# EAGLE board W1209_PIC (EAGLE 7.7.0)
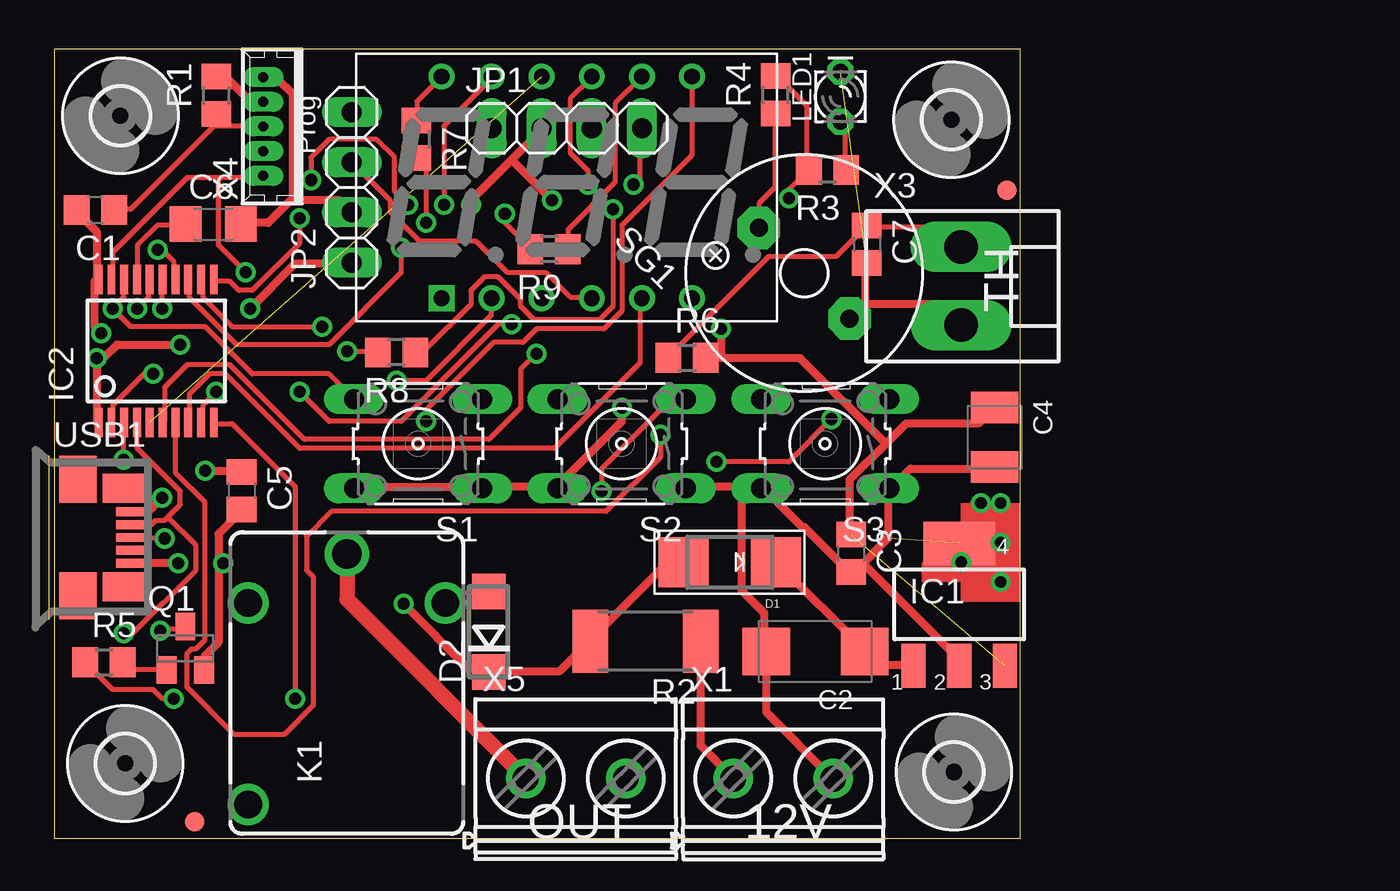
[diagram p0: board, top side]
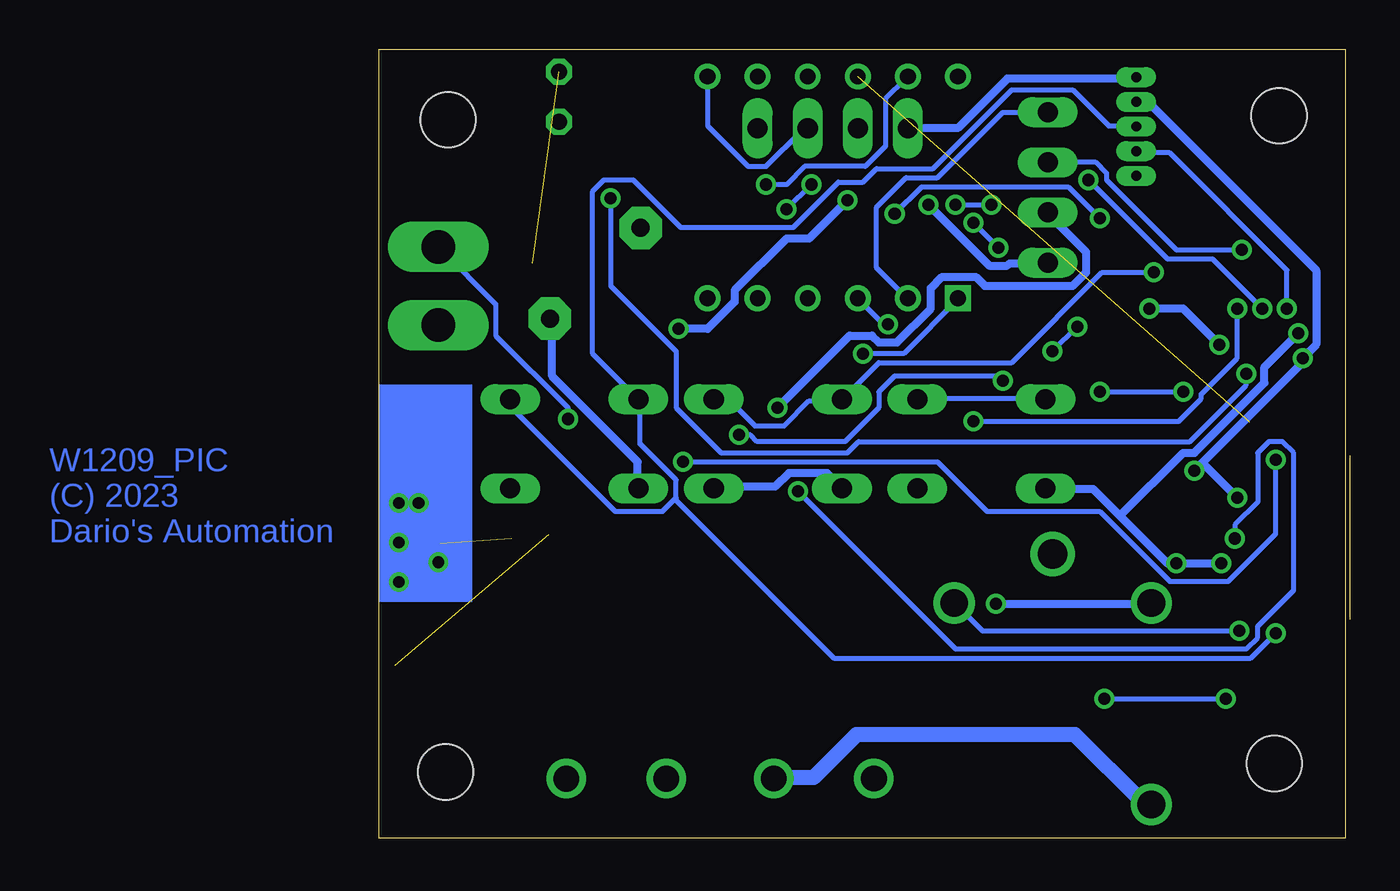
[diagram p1: board, bottom side, seen from below]

Size 49 x 40 mm. Coordinates in mm from the lower left corner, seen from the top.
Outline: 0,0 49,0 49,40 0,40 0,0
Copper layers (1*16): Top 0.035mm / dielectric 1.5mm / Bottom 0.035mm
Design rules "default": minimum track width 10mil, minimum drill 24mil, track to track 8mil, track to pad 8mil, pad to pad 8mil, via to via 8mil, smd to smd 8mil, copper to edge 40mil, drill to drill 8mil, minimum pad ring 10mil, minimum via ring 8mil, stop-mask expansion 4mil, vias tented up to drill 0mil, thermal gap 10mil
Net classes: 1 N1: width 1.016 mm, clearance 0.762 mm; 2 N2: width 0.762 mm, clearance 0.762 mm; 3 N3: width 0.406 mm; 4 GND: width 0.406 mm, clearance 0.152 mm

## Footprints (pad centres in the part's own frame; a part is rotated, then mirrored left to right if it is on the bottom)
C0805 = smd 1.3 x 1.5: 1 -0.95,0; 2 0.95,0
SMC_C = smd 2.4 x 2.4: + -2.5,0; - 2.5,0
SMC_B = smd 1.6 x 2.4: + -1.5,0; - 1.5,0
C1206 = smd 1.6 x 1.8: 1 -1.4,0; 2 1.4,0
SMADIODE = smd 2.54 x 2.54: A 2.349,0; C -2.349,0
DO214AC = smd 1.8 x 1.7: A 2.05,0; C -2.05,0
KLT36XX = drill 0.8 square: P$1 -6.35,-5.62 | drill 0.8: P$2 -3.81,-5.62; P$3 -1.27,-5.62; P$4 1.27,-5.62; P$5 3.81,-5.62; P$6 6.35,-5.62; P$7 6.35,5.62; P$8 3.81,5.62; P$9 1.27,5.62; P$10 -1.27,5.62; P$11 -3.81,5.62; P$12 -6.35,5.62
FIDUCIAL_1MM = smd 1 x 1: 1 0,0
2,8 = hole 2.8: 0,0
SOT223 = smd 1.219 x 2.235: 1 -2.311,-3.099; 2 0,-3.099; 3 2.311,-3.099 | smd 3.6 x 2.2: 4 0,3.099
SS20 = smd 0.4 x 1.5: 1 -2.925,-3.625; 2 -2.275,-3.625; 3 -1.625,-3.625; 4 -0.975,-3.625; 5 -0.325,-3.625; 6 0.325,-3.625; 7 0.975,-3.625; 8 1.625,-3.625; 9 2.275,-3.625; 10 2.925,-3.625; 11 2.925,3.625; 12 2.275,3.625; 13 1.625,3.625; 14 0.975,3.625; 15 0.325,3.625; 16 -0.325,3.625; 17 -0.975,3.625; 18 -1.625,3.625; 19 -2.275,3.625; 20 -2.925,3.625
1X04 = drill 1.016 long: 1 -3.81,0; 2 -1.27,0; 3 1.27,0; 4 3.81,0
JJM1A = drill 1.4: 1 4.05,5; 2 4.05,-5; NO -6.15,5 | drill 1.5: C 6.55,0
LD260 = drill 0.813 octagon: A -1.27,0; K 1.27,0
SOT23-BEC = smd 1 x 1.4: B -0.95,-1.1; C 0,1.1; E 0.95,-1.1
R0805 = smd 1.3 x 1.5: 1 -0.95,0; 2 0.95,0
R2512 = smd 1.8 x 3.2: 1 -2.8,0; 2 2.8,0
B3F-10XX = drill 1.016 long: 1 -3.251,2.261; 2 3.251,2.261; 3 -3.251,-2.261; 4 3.251,-2.261
F/QMBIII = drill 0.914 pad 2.159 octagon: + 3.251,0; - -3.251,0
MOLEX-47364-0001 = smd 1.7 x 0.45: 1 2.8,1.3; 2 2.8,0.65; 3 2.8,0; 4 2.8,-0.65; 5 2.8,-1.3 | smd 1.9 x 2.375: GND1 0,2.95; GND4 0,-2.95 | smd 2.1 x 1.475: GND2 2.3,2.5; GND3 2.3,-2.5
MKDSN1,5/2-5,08 = drill 1.3 pad 2: 1 -2.561,0.025; 2 2.519,0.025
KK-156-2 = drill 1.7 pad 2.184 long: 1 -1.98,0; 2 1.98,0
53047-05 = drill 0.5 pad 0.698 long: 1 2.5,0.45; 2 1.25,0.45; 3 0,0.45; 4 -1.25,0.45; 5 -2.5,0.45

## Placement (x,y rotation side)
C1  100n  [C0805]  2.1,31.85 180 top
C2  10u  [SMC_C]  38.61,9.47 180 top
C3  100n  [C0805]  40.42,14.45 270 top
C4  10u  [SMC_B]  47.7,20.34 270 top
C5  100n  [C0805]  9.52,17.62 270 top
C6  4.7u  [C1206]  8.07,31.14 0 top
C7  100n  [C0805]  41.22,30.11 270 top
D1  1N4007  [SMADIODE]  34.27,14 180 top
D2  BAT42-SMD  [DO214AC]  22.06,10.47 90 top
DS1  Display 3 digit 0.39  [KLT36XX]  26,33 0 top
F1  FIDUCIAL  [FIDUCIAL_1MM]  48.31,32.85 0 top
F2  FIDUCIAL  [FIDUCIAL_1MM]  7.13,0.85 0 top
H1  MOUNT-HOLE2.8  [2,8]  45.51,36.44 0 top
H2  MOUNT-HOLE2.8  [2,8]  3.62,3.8 0 top
H3  MOUNT-HOLE2.8  [2,8]  3.37,36.63 0 top
H4  MOUNT-HOLE2.8  [2,8]  45.63,3.37 0 top
IC1  MCP1825S-33  [SOT223]  45.9,11.86 0 top
IC2  PIC18F14K50SS  [SS20]  5.18,24.71 0 top
JP1  OLED top  [1X04]  26,36 0 top
JP2  OLED left  [1X04]  15.1,33 90 top
K1  JJM1A-12V  [JJM1A]  14.85,7.88 90 top
LED1  rosso  [LD260]  39.88,37.6 90 top
Q1  BC817-40SMD  [SOT23-BEC]  6.66,9.64 0 top
R1  10K  [R0805]  8.23,37.66 90 top
R2  10  [R2512]  30,10 180 top
R3  470  [R0805]  39.23,33.89 180 top
R4  100  [R0805]  36.59,37.69 90 top
R5  470  [R0805]  2.54,8.93 0 top
R6  10K  [R0805]  32.09,24.36 0 top
R7  180  [R0805]  18.38,35.44 270 top
R8  180  [R0805]  17.36,24.64 180 top
R9  180  [R0805]  25.11,29.86 180 top
S1  pulsante  [B3F-10XX]  18.46,20 180 top
S2  pulsante  [B3F-10XX]  28.79,20 180 top
S3  pulsante  [B3F-10XX]  39.1,20 180 top
SG1  F/QMBIII  [F/QMBIII]  38.04,28.65 135 top
USB1  MOLEX-47346-0001  [MOLEX-47364-0001]  1.21,15.25 0 top
X1  MKDSN1,5/2-5,08  [MKDSN1,5/2-5,08]  37,3 0 top
X3  NTC  [KK-156-2]  46,28 270 top
X4  53047-05  [53047-05]  11.06,36.09 90 top
X5  MKDSN1,5/2-5,08  [MKDSN1,5/2-5,08]  26.48,3.02 0 top

## Library data of the parts
C1-C7 R1-R9 = resistor
D1 F1 F2 = adafruit
D2 = diode
DS1 = kingbright
H1-H4 = holes
IC1 IC2 = microchip2
JP1 JP2 = pinhead
K1 = relay; OC_FARNELL: unknown; OC_NEWARK: unknown
LED1 = led
Q1 = transistor-npn
S1-S3 = switch-omron; MPN: B3F-1000; OC_FARNELL: 176432; OC_NEWARK: 36M3542
SG1 = buzzer; OC_FARNELL: unknown; OC_NEWARK: unknown
USB1 = usb_con-update
X1 X5 = con-phoenix-508
X3 = con-molex; OC_FARNELL: unknown; OC_NEWARK: unknown
X4 = con-molex; MF: MOLEX; MPN: 53047-0510; OC_FARNELL: 9732861; OC_NEWARK: 38C9901

## Nets
+5V [N3]: C3.1 C4.+ C5.1 IC1.3 IC2.1 JP1.2 JP2.1 R1.2 R6.2 USB1.1 X4.2
+12V [N3]: D1.A D2.C K1.1 R2.2
AN0: C7.1 IC2.3 R6.1 X3.1
D+: IC2.19 S2.3 S2.4 USB1.3 X4.5
GND [N3]: C1.2 C2.- C3.2 C4.- C5.2 C6.2 C7.2 IC1.2 IC1.4 IC2.20 JP1.1 JP2.2 LED1.K Q1.E S1.1 S1.2 S2.1 S2.2 S3.1 S3.2 SG1.- USB1.5 X1.2 X3.2 X4.1
K1: IC2.13 R7.2
K2: IC2.12 R8.2
K3: IC2.11 R9.2
LED: IC2.2 R3.2 R4.2
N$1 [N3]: C2.+ D1.C IC1.1
N$2: D2.A K1.2 Q1.C
N$3 [N2]: K1.C X5.1
N$4 [N2]: K1.NO X5.2
N$5: R4.1 SG1.+
N$6 [N3]: R2.1 X1.1
N$7: DS1.P$12 R7.1
N$8: DS1.P$8 R9.1
N$9: DS1.P$9 R8.1
N$11: Q1.B R5.2
N$14: LED1.A R3.1
N$15: C6.1 IC2.17
RELE: IC2.10 R5.1
SEG_A: DS1.P$11 IC2.16 JP1.4
SEG_B: DS1.P$7 IC2.15 JP1.3
SEG_C: DS1.P$4 IC2.14 JP2.3
SEG_D: DS1.P$2 IC2.7 JP2.4
SEG_DP: DS1.P$3 IC2.9
SEG_E: DS1.P$1 IC2.6
SEG_F: DS1.P$10 IC2.5
SEG_G: DS1.P$5 IC2.8
SW1: IC2.18 S1.3 S1.4 X4.4
SW3: C1.1 IC2.4 R1.1 S3.3 S3.4 USB1.2 X4.3

## Tracks (layer width: path | path; a pad name or v marks a point on that pad's centre or on a via)
+5V  (via drill 0.61)  (1 unrouted)
  Top 0.406: 42.18,20 43.2,21.03 46.86,21.03 47.66,21.83 C4.+ | 42.18,20 40.35,18.17 40.35,15.43 C3.1 | 33.83,24.35 37.83,24.35 42.18,20 | 33.83,24.35 33.15,24.35 R6.2 | v21.14,32.12 21.14,32.35 23.2,34.4 | 23.2,34.4 24.69,35.89 JP1.2 | IC2.1 2.17,21.14 v2.17,24.35 2.29,24.46 2.63,24.46 3.2,25.03 v6.4,25.03 | v7.66,18.63 9.49,18.63 C5.1 | R1.2 8.34,38.52 8.8,38.52 9.94,37.38 10.52,37.38 X4.2 | v5.49,17.26 4.8,16.57 4.12,16.57 USB1.1 | v9.94,26.86 12.23,29.15 15.09,29.15 JP2.1 | v33.83,25.83 33.83,24.35 | 23.2,34.4 v25.26,32.35
  Bottom 0.406: v21.14,32.12 18.06,29.03 17.14,29.03 17.03,29.15 15.2,29.15 JP2.1 | X4.2 10.52,37.26 9.94,37.26 1.49,28.8 1.49,25.03 v2.17,24.35 2.06,24.23 7.26,19.03 | 7.26,19.03 v7.66,18.63 | 7.26,19.03 v5.49,17.26 | v9.94,26.86 8.23,26.86 v6.4,25.03 | v33.83,25.83 32.35,25.83 30.98,27.2 30.98,27.77 28.35,30.4 27.2,30.4 v25.26,32.35
+12V  (via drill 0.61)
  Top 0.406: D1.A 31.89,13.95 31.09,13.95 27.32,10.17 R2.2 27.09,9.94 25.6,8.46 22.17,8.46 D2.C 21.95,8.57 21.03,8.57 v17.72,11.89
  Bottom 0.406: v17.72,11.89 9.94,11.89 K1.1
AN0  (via drill 0.61)
  Top 0.254: R6.1 31.2,24.46 36.23,29.49 39.66,29.49 41.15,30.98 C7.1 41.26,30.98 45.03,30.98 45.95,30.06 X3.1 | v3.54,19.2 3.54,21.03 IC2.3 | v33.6,19.09 37.26,19.09 v39.43,21.26
  Bottom 0.254: v3.54,19.2 3.54,15.43 5.94,13.03 8.91,13.03 12.46,16.57 18.17,16.57 20.69,19.09 v33.6,19.09 | v39.43,21.26 39.43,21.83 43.09,25.49 43.09,27.09 45.95,29.95 X3.1
D+  (via drill 0.61)
  Top 0.254: 8.34,33.49 10.52,33.49 X4.5 | 8.34,33.49 6.74,33.49 2.97,29.72 2.97,28.35 IC2.19 | v5.6,15.2 4.12,15.2 USB1.3 | v27.77,17.6 27.77,18.75 31.2,22.17 32,22.17 S2.3 | 8.34,33.49 8.34,30.06 v9.72,28.69
  Bottom 0.254: v5.6,15.2 5.6,15.89 4.46,17.03 4.46,19.55 3.89,20.12 3.2,20.12 2.63,19.55 2.63,12.57 4.46,10.74 4.46,10.17 5.03,9.6 19.77,9.6 v27.77,17.6 | S2.3 32,22.17 31.2,22.17 29.95,20.92 28.46,20.92 27.2,22.17 25.6,22.17 S2.4 25.49,22.29 23.66,24.12 16.92,24.12 12.34,28.69 v9.72,28.69
GND  (via drill 0.61)  (2 unrouted)
  Top 0.406: 41.15,27.2 41.15,29.15 C7.2 | 41.15,27.2 40.35,26.4 SG1.- | 41.15,27.2 41.26,27.09 44.92,27.09 45.95,26.06 X3.2 | X1.2 39.43,3.09 36.12,6.4 36.12,9.37 C2.- 36.01,9.6 36.01,11.43 34.86,12.57 34.86,17.72 S3.2 | S2.1 32.12,17.83 35.78,17.83 S3.2 | C3.2 40.46,13.6 40.69,13.6 42.29,15.2 42.29,17.72 S3.1 42.52,17.83 43.43,18.75 47.66,18.75 C4.- | IC1.2 45.83,8.8 45.83,9.14 41.15,13.83 C3.2 | S3.2 36.01,17.72 37.95,15.77 38.06,15.77 40.35,13.49 C3.2 | 12,32.35 10.86,31.2 9.49,31.2 C6.2 | 12,32.35 14.52,32.35 15.09,31.77 JP2.2 | X4.1 10.63,38.52 11.32,38.52 12.12,37.72 12.12,32.46 12,32.35 | 8.34,13.95 8.34,15.43 9.49,16.57 C5.2 | 8.34,13.95 8.34,9.94 7.66,9.26 7.66,8.57 Q1.E | 2.17,28.35 2.17,30.75 1.26,31.66 1.26,31.77 C1.2 | 2.17,28.35 IC2.20 | v6.29,13.95 4.12,13.95 USB1.5 | v2.4,25.6 2.06,25.95 2.06,28.23 2.17,28.35 | S1.2 15.32,17.83 21.6,17.83 S1.1 21.72,17.83 25.49,17.83 S2.2 25.6,17.95 28.8,21.14 v28.8,21.83 | v8.57,13.95 8.34,13.95
  Bottom 0.406: SG1.- 40.23,26.29 40.23,23.43 35.89,19.09 35.89,17.83 S3.2 | JP1.1 22.17,36.01 19.66,36.01 17.14,38.52 10.63,38.52 X4.1 | v6.29,13.95 v8.57,13.95 9.03,13.95 11.43,16.34 | 11.43,16.34 12.8,17.72 15.2,17.72 S1.2 | v2.4,25.6 4.12,23.89 4.12,23.09 7.66,19.55 8.23,19.55 11.43,16.34 | v28.8,21.83 25.15,25.49 24,25.49 23.66,25.15 22.75,25.15 21.03,26.86 21.03,27.89 20.46,28.46 18.75,28.46 18.29,28 13.83,28 13.14,28.69 13.14,29.72 15.09,31.66 JP2.2 | S2.1 32,17.83 28.92,17.83 28.23,18.52 26.29,18.52 25.6,17.83 S2.2
K1  (via drill 0.61)
  Top 0.254: v17.6,29.95 17.6,28.69 13.95,25.03 9.26,25.03 6.86,27.43 6.86,28.23 IC2.13 | v18.86,31.2 18.86,33.95 18.4,34.4 R7.2
  Bottom 0.254: v18.86,31.2 v17.6,29.95
K2  (via drill 0.61)
  Top 0.254: v14.86,24.69 16.34,24.69 R8.2 | v13.6,25.95 9.03,25.95 7.54,27.43 7.54,28.23 IC2.12
  Bottom 0.254: v13.6,25.95 v14.86,24.69
K3  (via drill 0.61)
  Top 0.254: v12.46,31.43 12.46,30.18 10.06,27.77 9.37,27.77 8.91,28.23 8.12,28.23 IC2.11 | v22.86,31.66 22.86,31.2 24.12,29.95 R9.2
  Bottom 0.254: v12.46,31.43 14.06,33.03 21.49,33.03 v22.86,31.66
LED  (via drill 0.61)
  Top 0.254: v5.03,23.55 4.57,23.55 2.97,21.95 2.97,21.14 IC2.2 | v37.26,32.46 37.26,32.92 38.18,33.83 R3.2 38.18,33.95 38.18,37.15 36.69,38.63 R4.2
  Bottom 0.254: v5.03,23.55 5.03,22.97 7.89,20.12 24.69,20.12 25.26,19.55 31.66,19.55 33.95,21.83 33.95,24.69 37.26,28 v37.26,32.46
N$1
  Top 0.406: IC1.1 43.55,8.8 41.72,8.8 41.15,9.37 C2.+ 41.03,9.6 36.69,13.95 D1.C
N$2  (via drill 0.61)
  Top 0.254: v5.37,10.52 5.49,10.63 6.63,10.63 Q1.C | D2.A 22.06,12.46 20.34,12.46 19.89,12 K1.2
  Bottom 0.254: v5.37,10.52 18.4,10.52 19.77,11.89 K1.2
N$3
  Top 0.762: X5.1 23.89,3.09 14.86,12.12 14.86,14.4 K1.C
N$4
  Bottom 0.762: X5.2 28.92,3.09 26.98,3.09 24.8,5.26 13.72,5.26 10.29,1.83 9.94,1.83 K1.NO
N$5
  Top 0.254: R4.1 36.58,36.69 36.58,33.03 35.78,32.23 35.78,30.98 SG1.+
N$6
  Top 0.406: R2.1 32.8,9.94 32.8,4.69 34.4,3.09 X1.1
N$7
  Top 0.254: R7.1 18.4,36.46 18.4,37.38 19.55,38.52 DS1.P$12
N$8
  Top 0.254: R9.1 26.06,29.95 26.06,30.86 28.46,33.26 28.46,37.26 29.72,38.52 DS1.P$8
N$9  (via drill 0.61)
  Top 0.254: v28.35,31.89 28.35,26.98 27.66,26.29 24.35,26.29 23.66,26.98 23.66,27.32 22.52,28.46 21.83,28.46 21.14,27.77 21.14,27.09 18.75,24.69 18.4,24.69 R8.1 | v27.09,33.15 27.09,33.83 26.18,34.75 26.18,37.49 27.2,38.52 DS1.P$9
  Bottom 0.254: v27.09,33.15 v28.35,31.89
N$10  (via drill 0.6)
  other vias: 48,17
N$11
  Top 0.254: Q1.B 5.6,8.57 3.89,8.57 3.54,8.91 R5.2
N$12  (via drill 0.6)
  other vias: 47,17
N$13  (via drill 0.6)
  other vias: 48,15
N$14
  Top 0.254: R3.1 40.12,33.95 40.12,36.01 39.89,36.23 LED1.A
N$15
  Top 0.254: IC2.17 4.23,28.35 4.23,30.06 5.26,31.09 6.63,31.09 C6.1
N$16  (via drill 0.6)
  other vias: 48,13
N$17  (via drill 0.6)
  other vias: 46,14
RELE  (via drill 0.61)
  Top 0.254: v6.06,7.09 5.49,7.09 5.03,7.54 2.97,7.54 1.6,8.91 R5.1 | v12.23,7.09 12.23,17.83 9.03,21.03 8.12,21.03 IC2.10
  Bottom 0.254: v12.23,7.09 v6.06,7.09
SEG_A  (via drill 0.61)
  Top 0.254: v4.23,26.86 4.8,27.43 4.8,28.23 IC2.16 | v13.03,33.38 13.03,34.52 13.95,35.43 16.34,35.43 17.26,34.52 17.26,32.8 v17.95,32.12 | v19.77,32.12 19.77,36.12 22.17,38.52 DS1.P$11 | v29.38,33.15 29.72,33.49 29.72,35.89 JP1.4
  Bottom 0.254: v4.23,26.86 6.74,29.38 9.03,29.38 v13.03,33.38 | v19.77,32.12 v17.95,32.12 | v29.38,33.15 28.35,33.15 27.43,34.06 24.35,34.06 23.32,35.09 23.32,37.49 22.29,38.52 DS1.P$11
SEG_B  (via drill 0.61)
  Top 0.254: v5.49,26.86 5.49,28.23 IC2.15 | v18.86,21.14 18.86,21.72 22.29,25.15 23.77,25.15 24.46,25.83 27.89,25.83 28.8,26.75 28.8,31.09 32.35,34.63 32.35,38.52 DS1.P$7
  Bottom 0.254: v5.49,26.86 5.49,24.35 7.32,22.52 7.32,22.29 8.46,21.14 v18.86,21.14 | JP1.3 27.32,35.89 27.55,35.89 29.38,34.06 30.29,34.06 32.35,36.12 32.35,38.52 DS1.P$7
SEG_C  (via drill 0.61)
  Top 0.254: v5.26,29.83 5.49,29.83 6.06,29.26 6.06,28.35 IC2.14 | DS1.P$4 27.2,27.43 26.18,27.43 24.92,28.69 22.97,28.69 21.37,30.29 18.52,30.29 17.03,31.77 17.03,32.35 15.2,34.18 JP2.3
  Bottom 0.254: v5.26,29.83 8.57,29.83 12.12,33.38 12.12,33.72 12.69,34.29 15.09,34.29 JP2.3
SEG_D  (via drill 0.61)
  Top 0.254: v30.75,20.46 30.75,19.32 28,16.57 14.06,16.57 12.8,15.32 12.8,13.6 13.14,13.26 13.14,6.74 11.66,5.26 9.14,5.26 6.74,7.66 6.74,9.37 6.97,9.6 7.2,9.6 7.66,10.06 7.66,17.03 6.17,18.52 6.17,21.03 IC2.7 | v17.37,23.2 18.86,23.2 22.17,26.52 22.17,27.32 DS1.P$2
  Bottom 0.254: v30.75,20.46 30.18,20.46 29.83,20.12 25.38,20.12 23.66,21.83 23.66,22.63 22.86,23.43 17.6,23.43 v17.37,23.2 | JP2.4 15.2,36.8 17.37,36.8 20.69,33.49 22.29,33.49 23.77,32 23.77,28.92 22.29,27.43 DS1.P$2
SEG_DP  (via drill 0.61)
  Top 0.254: v8.23,22.63 7.54,21.95 7.54,21.14 IC2.9 | v12.46,22.63 13.95,21.14 17.6,21.14 22.52,26.06 v23.2,26.06
  Bottom 0.254: v12.46,22.63 v8.23,22.63 | v23.2,26.06 23.43,26.06 24.69,27.32 DS1.P$3
SEG_E  (via drill 0.61)
  Top 0.254: v24.46,24.57 23.66,23.77 23.66,21.83 22.06,20.23 12.69,20.23 8.91,24 6.74,24 5.6,22.86 5.6,21.14 IC2.6
  Bottom 0.254: v24.46,24.57 22.4,24.57 19.66,27.32 DS1.P$1
SEG_F  (1 unrouted)
SEG_G
  Top 0.254: IC2.8 6.86,21.14 6.86,22.52 7.89,23.55 8.69,23.55 12.46,19.77 25.38,19.77 29.72,24.12 29.72,27.32 DS1.P$5
SW1  (via drill 0.61)
  Top 0.254: 3.31,26.86 3.31,26.52 3.89,25.95 7.66,25.95 10.06,23.55 13.95,23.55 15.2,22.29 S1.4 | 3.31,26.86 3.31,27.2 3.54,27.43 3.54,28.23 IC2.18 | 3.31,26.86 v2.97,26.86
  Bottom 0.254: v2.97,26.86 2.97,28.8 8.91,34.75 10.52,34.75 X4.4 | S1.3 21.6,22.29 15.32,22.29 S1.4
SW3  (via drill 0.61)
  Top 0.254: C1.1 3.09,31.89 3.89,31.89 8.23,36.23 8.23,36.69 R1.1 8.23,36.12 10.52,36.12 X4.3 | 5.77,16.29 5.6,16.12 5.14,16.12 4.92,15.89 4.12,15.89 USB1.2 | 5.77,16.29 6.4,16.92 6.4,17.6 4.23,19.77 4.23,21.03 IC2.4 | 5.77,16.29 7.2,14.86 7.2,13.6 4,10.4 v3.54,10.4
  Bottom 0.254: 33.95,17.26 33.95,18.17 35.78,20 35.78,22.17 S3.4 35.89,22.29 38.18,24.57 38.18,32.8 37.6,33.38 36.12,33.38 33.72,30.98 28,30.98 25.72,33.26 24.46,33.26 23.77,33.95 20.92,33.95 16.92,37.95 13.83,37.95 12,36.12 10.63,36.12 X4.3 | 33.95,17.26 34.63,16.57 37.03,16.57 42.29,21.83 42.29,22.17 S3.3 | v3.54,10.4 4.8,9.14 25.95,9.14 33.95,17.14 33.95,17.26
(copper drawn outside any net)
  shapes: Bottom area x1, Top area x2

## Text on the board
Bottom: W1209_PIC / (C) 2023 / Dario's Automation
tPlace: OUT
tNames: Prog | TH | 12V